# Altium PCB Z693_Test_JK08_V1.0.PcbDoc (part 1 of 2)
Units mil, origin at the board's own origin, x right, y up, seen from the top; angles counter-clockwise.
Board outline 3841.14 x 4075.65 mil, 2 copper layers (Top Layer, Bottom Layer); 150 components, 98 nets, 518 pads, 261 vias.
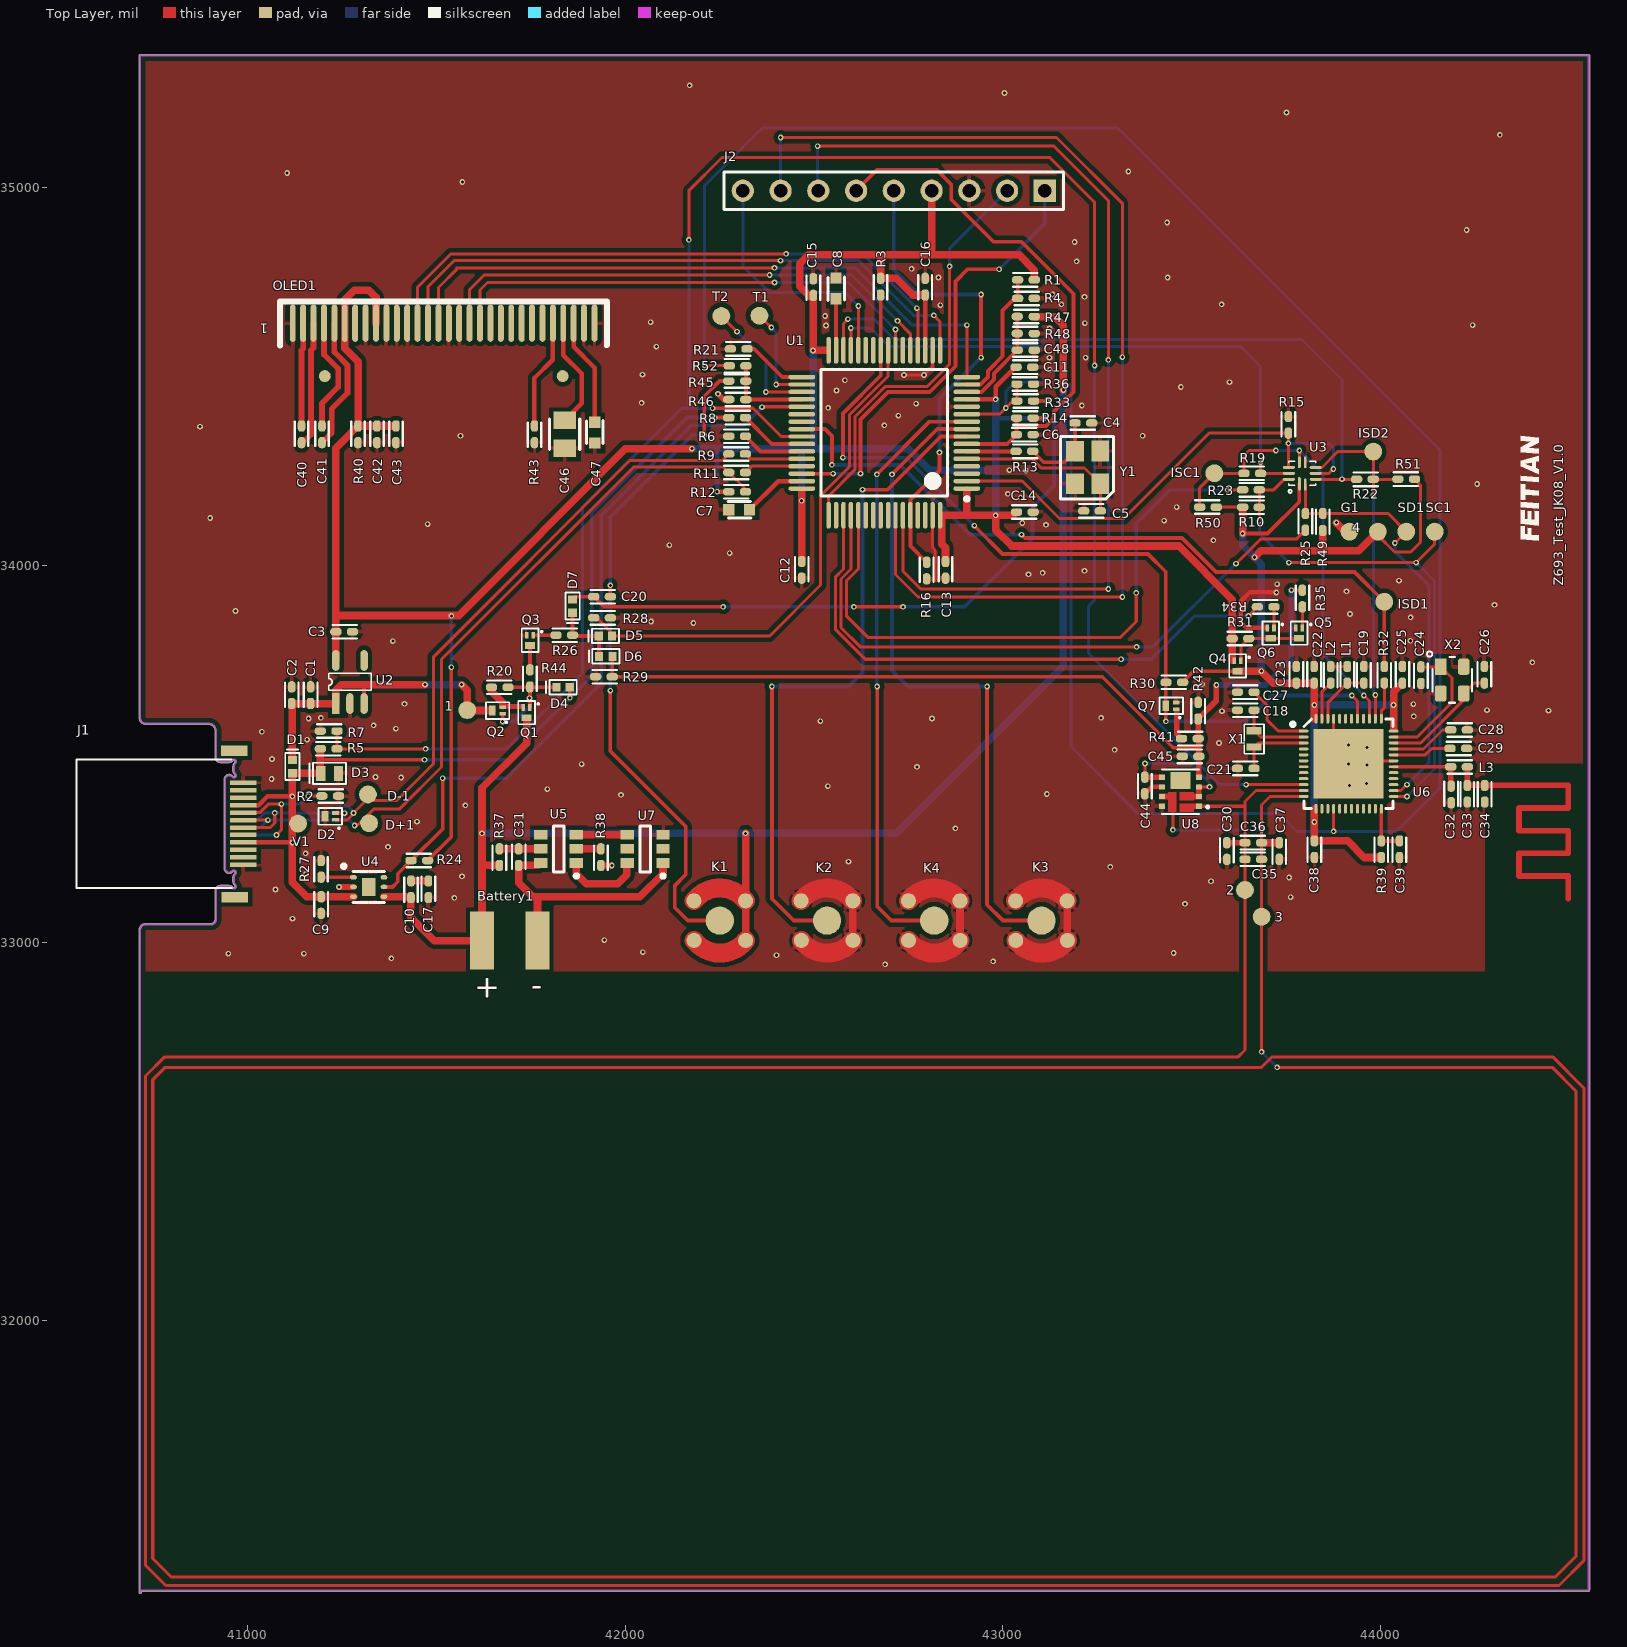
[diagram p0: Top Layer view]
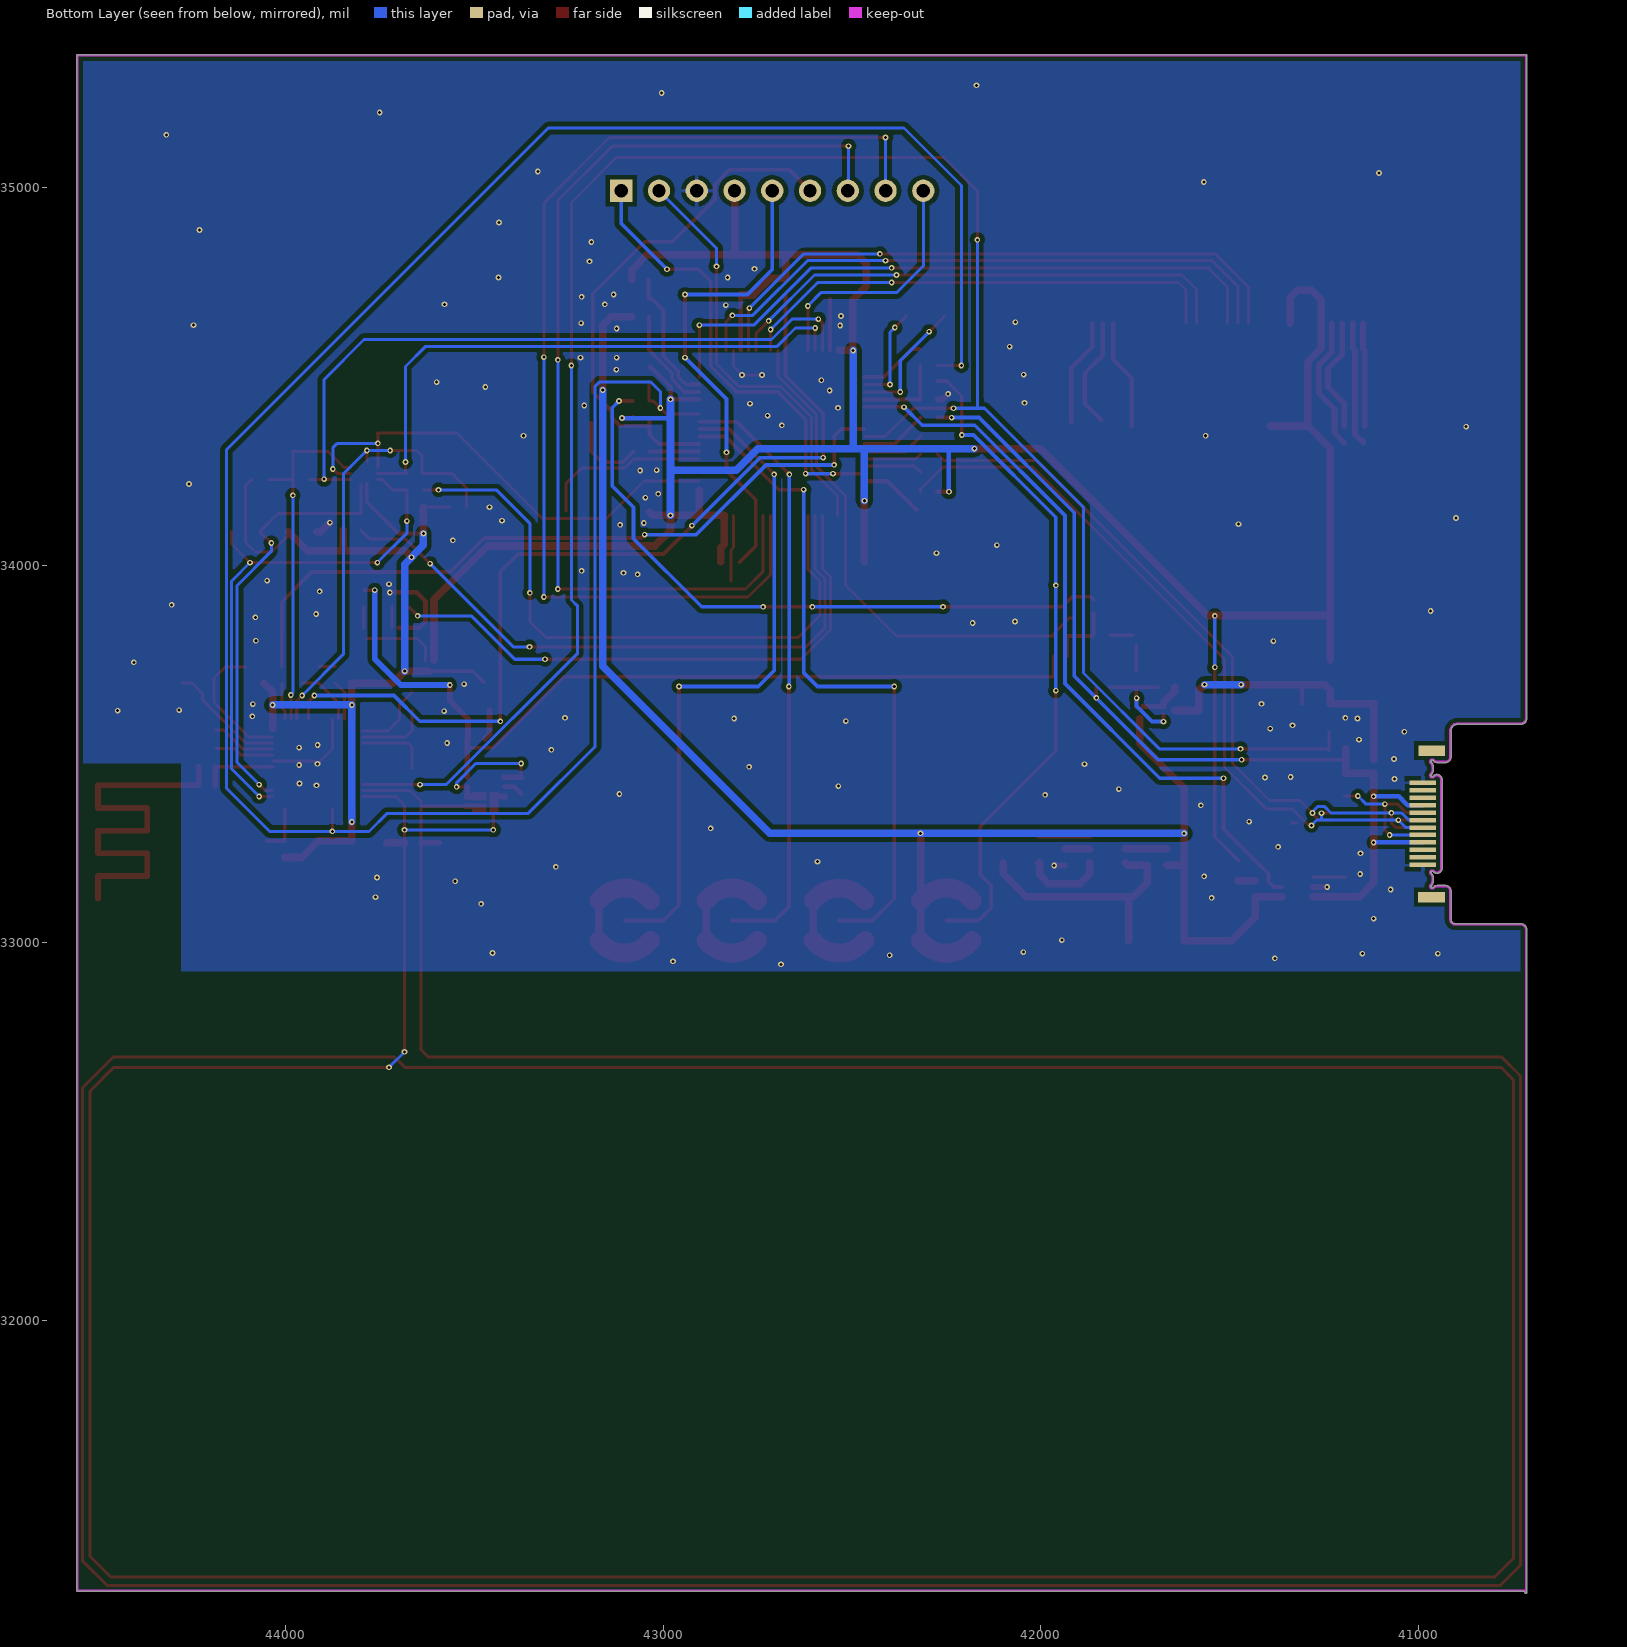
[diagram p1: Bottom Layer view, seen from below]

## Layer stack, top to bottom
Top Layer: signal copper 1.4
Dielectric: dielectric 12.6, FR-4, Dk 4.8
Bottom Layer: signal copper 1.4

## Board outline
40712.37,31279.31 ccw(c40714.89,31279.31) 40717.4,31279.31 40717.4,31282.49 44551,31282.49 ccw(c44551,31285) 44553.51,31285 44553.51,35349.94 ccw(c44551,35349.94) 44551,35352.46 40714.89,35352.46 ccw(c40714.89,35349.94) 40712.37,35349.94 40712.37,33594.94 ccw(c40728.67,33594.94) 40728.64,33578.65 ccw(c40728.67,33594.94) 40728.67,33578.65 cw(c40728.67,33581.16) 40728.64,33578.65 40728.67,33578.65 40895.99,33578.65 cw(c40895.99,33561.48) 40913.16,33561.48 ccw(c40915.68,33561.48) 40913.16,33561.46 40913.16,33491.79 ccw(c40927.49,33491.79) 40927.49,33477.47 40949.7,33477.47 ccw(c40949.7,33491.79) 40960.38,33482.24 cw(c40962.91,33479.98) 40966.3,33479.98 cw(c40962.91,33479.98) 40965.17,33477.46 ccw(c40974.72,33466.78) 40960.39,33466.78 40960.39,33466.77 40960.41,33456.02 ccw(c40962.92,33456.03) 40960.41,33455.91 ccw(c40974.72,33456.57) 40965.17,33445.9 cw(c40962.91,33443.37) 40966.3,33443.37 cw(c40962.91,33443.37) 40960.37,33441.13 ccw(c40949.62,33431.65) 40951.44,33445.86 ccw(c40949.62,33431.65) 40951.41,33445.86 40951.44,33445.86 ccw(c40951.1,33443.37) 40951.1,33445.88 ccw(c40951.1,33431.56) 40936.77,33431.58 ccw(c40951.1,33431.56) 40936.77,33431.56 cw(c40939.29,33431.56) 40936.77,33431.58 cw(c40939.29,33431.56) 40936.77,33431.59 40936.77,33431.56 40936.77,33198.09 ccw(c40939.29,33198.09) 40936.77,33198.06 cw(c40951.1,33198.09) 40936.77,33198.07 cw(c40951.1,33198.09) 40936.77,33198.09 40936.77,33431.56 40936.77,33198.06 ccw(c40951.1,33198.09) 40951.07,33183.77 ccw(c40951.1,33198.09) 40951.1,33183.77 40951.07,33183.77 ccw(c40951.1,33186.28) 40951.41,33183.79 ccw(c40949.62,33198) 40960.37,33188.52 cw(c40962.91,33186.28) 40966.3,33186.28 cw(c40962.91,33186.28) 40965.17,33183.75 ccw(c40974.72,33173.08) 40960.39,33173.08 40960.39,33162.48 ccw(c40974.72,33162.48) 40965.17,33151.8 cw(c40962.91,33149.27) 40966.3,33149.27 cw(c40962.91,33149.27) 40960.38,33147.01 ccw(c40949.7,33137.46) 40949.73,33151.79 ccw(c40949.7,33137.46) 40949.7,33151.79 cw(c40949.7,33149.27) 40949.73,33151.79 40949.7,33151.79 40927.49,33151.79 ccw(c40927.49,33149.27) 40927.46,33151.79 cw(c40927.49,33137.46) 40927.49,33151.79 40927.46,33151.79 ccw(c40927.49,33137.46) 40913.16,33137.46 40913.16,33061.87 cw(c40915.68,33061.87) 40913.16,33061.89 40913.16,33061.87 cw(c40901.9,33061.87) 40901.9,33050.61 40728.67,33050.61 ccw(c40728.67,33034.31) 40712.37,33034.31

## Design rules (kind name [scope] priority, off if disabled: settings)
Clearance Clearance_1 [InPolygon] p1: gap=12
Clearance [All] p2: gap=6
HoleToHoleClearance [All] p1: gap=0 allowstackedmicrovias=TRUE
MinimumSolderMaskSliver [All] p1: minsoldermaskwidth=0
PolygonConnect PolygonConnect_1 [isvia] p1: connectstyle=Direct reliefconductorwidth=10 reliefentries=4 polygonreliefangle="90 Angle"
PolygonConnect [All] p2: connectstyle=Relief reliefconductorwidth=10 reliefentries=4 polygonreliefangle="90 Angle"
RoutingVias [All] p1: holewidth=4 width=25 viastyle="Through Hole" minholewidth=8 minwidth=15 maxholewidth=28 maxwidth=50
SilkToSilkClearance [All] p1: silktosilkclearance=0
SilkscreenOverComponentPads [All] p1: minsilkscreentomaskgap=0
SolderMaskExpansion [All] p1: expansion=4
Width [All] p1: maxlimit=150 minlimit=6 preferedwidth=10
24 further rules are at their usual default settings.

## Components (designator, comment, footprint, x,y, rotation, side; value= is the part's Value field where it differs from the comment)
1 "" FT_TEST_1 41580.89,33616.25 r90 top
2 "" FT_TEST_1 43641,33140 r90 top
3 "" FT_TEST_1 43685,33069 r90 top
4 "" FT_TEST_1 43993,34089 r90 top
Battery1 "Battery" FT_CELL 41666,32927.83 r90 top
C1 "0.1uF" FT_0402#1 41166,33633.83 r90 top
C2 "1uF" FT_0402#1 41116,33633.83 r90 top
C3 "1uF" FT_0402#1 41233,33823.83 r0 top
C4 "15p" FT_0402#1 43234.78,34376.83 r180 top
C5 "15p" FT_0402#1 43257.89,34143.83 r180 top
C6 "100n" FT_0402#1 43079.89,34345.83 r180 top
C7 "2u2" FT_0603 42273.78,34146.76 r0 top
C8 "2u2" FT_0603 42557.78,34760.83 r270 top
C9 "1uF" FT_0402#1 41193.89,33077.83 r90 top
C10 "1uF/16V" FT_0402#1 41432,33163.83 r270 top
C11 "100n" FT_0402#1 43034.89,34524.83 r0 top
C12 "100n" FT_0402#1 42466.89,33965.83 r90 top
C13 "100n" FT_0402#1 42847.78,33965.83 r90 top
C14 "100n" FT_0402#1 43079.89,34140.83 r180 top
C15 "100n" FT_0402#1 42497.78,34758.83 r270 top
C16 "100n" FT_0402#1 42793.89,34759.83 r270 top
C17 "1uF/16V" FT_0402#1 41478,33119.83 r90 top
C18 "12pF" FT_0402#1 43665,33615.83 r180 top
C19 "1uF" FT_0402#1 43956,33731.83 r270 top
C20 "0.1uF" FT_0402#1 41916,33916.83 r0 top
C21 "12pF" FT_0402#1 43665,33461.83 r180 top
C22 "4.7uF" FT_0402#1 43824,33687.83 r90 top
C23 "1uF" FT_0402#1 43776.9,33687.83 r90 top
C24 "12pF" FT_0402#1 44106.89,33730.83 r270 top
C25 "0.1uF" FT_0402#1 44058,33687.83 r90 top
C26 "12pF" FT_0402#1 44275,33687.83 r90 top
C27 "0.1uF" FT_0402#1 43665,33663.83 r180 top
C28 "100pF" FT_0402#1 44185.89,33563.83 r0 top
C29 "NC" FT_0402#1 44184,33514.83 r0 top
C30 "NC" FT_0402#1 43593,33221 r90 top
C31 "1uf" FT_0402#1 41717.22,33204.83 r90 top
C32 "0.8pF" FT_0402#1 44186.89,33370.83 r90 top
C33 "NC" FT_0402#1 44229.89,33416.83 r270 top
C34 "1.2pF" FT_0402#1 44275.89,33416.83 r270 top
C35 "NC" FT_0402#1 43685,33221.11 r180 top
C36 "NC" FT_0402#1 43685,33265.11 r180 top
C37 "NC" FT_0402#1 43732,33265.11 r270 top
C38 "0.1uF" FT_0402#1 43824.89,33269.83 r270 top
C39 "1uF" FT_0402#1 44050.1,33269.83 r270 top
C40 "1uF" FT_0402#1 41142,34324.83 r90 top
C41 "1uF" FT_0402#1 41196.25,34324.83 r90 top
C42 "0.1uF" FT_0402#1 41341.75,34324.83 r90 top
C43 "0.1uF" FT_0402#1 41392,34324.83 r90 top
C44 "1uF/16V" FT_0402#1 43375.88,33438.65 r270 top
C45 "1uF" FT_0402#1 43518.88,33493.65 r180 top
C46 "4.7uF" FT_0805 41839,34383.83 r270 top
C47 "2.2uF" FT_0603 41919,34323.83 r90 top
C48 "0.01u" FT_0402#2 43082.89,34569.83 r180 top
D1 "DFN1006/WSB5546N-2/TR/1.0*0.6mm" WSB5546N 41117.89,33466.83 r90 top
D2 "ESD5302N-3/TR/NC" FT_DFN1006-3L 41231.89,33325.83 r90 top
D3 "ESD56201D10-2/TR/NC" DFN1610 41240,33448.83 r180 top
D4 "DFN1006/WSB5546N-2/TR/1.0*0.6mm" WSB5546N 41835,33676.83 r180 top
D5 "DFN1006/WSB5546N-2/TR/1.0*0.6mm" WSB5546N 41947,33812.83 r180 top
D6 "DFN1006/WSB5546N-2/TR/1.0*0.6mm" WSB5546N 41948,33758.83 r180 top
D7 "DFN1006/WSB5546N-2/TR/1.0*0.6mm" WSB5546N 41860,33891.83 r270 top
D+1 "" FT_TEST_1 41320.89,33316.83 r180 top
D-1 "" FT_TEST_1 41317.89,33392.83 r180 top
G1 "" FT_TEST_1 43917.76,34089 r0 top
ISC1 "" FT_TEST_1 43559.89,34243.83 r90 top
ISD1 "" FT_TEST_1 44009.89,33903.11 r90 top
ISD2 "" FT_TEST_1 43980.89,34301 r90 top
J1 "USB-FM0512-D5509（内芯）（夹板式0.8mm）" FM0512-D5509 40988,33206.83 r270 top
J2 "烧写点" FT_SIP_9 43110.89,34991.83 r180 top
K1 "锅仔片/5mm" FT_BUTTON_5mm 42250,33058.83 r0 top
K2 "OK" FT_BUTTON_5mm 42534,33058.83 r180 top
K3 "UP" FT_BUTTON_5mm 43102,33058.83 r0 top
K4 "DOWN" FT_BUTTON_5mm 42818,33058.83 r0 top
L1 "15nH" FT_0402#1 43912,33687.83 r90 top
L2 "10uH" FT_0402#1 43868,33731.83 r270 top
L3 "3.9nH" FT_0402#1 44186,33465.83 r0 top
OLED1 "UGOLED-12864" OLED_PIN30 41118.78,34641.09 r0 top
Q1 "DFN1006-3L/WPM2049B-3/TR/PMOS管" FT_DFN1006-3L 41746.86,33623.39 r180 top
Q2 "DFN1006-3L/WPM2049B-3/TR/PMOS管" FT_DFN1006-3L 41674.86,33606.39 r90 top
Q3 "DFN1006-3L/WNM2046B-3/TR/NMOS管" FT_DFN1006-3L 41756,33814.83 r180 top
Q4 "DFN1006-3L/WPM2049B-3/TR/PMOS管" FT_DFN1006-3L 43630,33746.83 r180 top
Q5 "DFN1006-3L/WNM2046B-3/TR/NMOS管" FT_DFN1006-3L 43793,33833.83 r180 top
Q6 "DFN1006-3L/WNM2046B-3/TR/NMOS管" FT_DFN1006-3L 43717.89,33833.83 r180 top
Q7 "DFN1006-3L/WNM2046B-3/TR/NMOS管" FT_DFN1006-3L 43458.89,33618.83 r90 top
R1 "NC" FT_0402#1 43082.89,34755.83 r180 top
R2 "5.1K" FT_0402#1 41196,33388.83 r0 top
R3 "10k" FT_0402#1 42675.78,34759.83 r270 top
R4 "NC" FT_0402#1 43038.89,34706.83 r0 top
R5 "10K" FT_0402#1 41236,33513.83 r180 top
R6 "0R" FT_0402#1 42317.78,34341.75 r180 top
R7 "20K" FT_0402#1 41192,33560.83 r0 top
R8 "22R" FT_0402#1 42273.78,34390.97 r0 top
R9 "22R" FT_0402#1 42317.78,34294.72 r180 top
R10 "10K" FT_0402#1 43634.89,34153.83 r0 top
R11 "22R" FT_0402#1 42317.78,34245.7 r180 top
R12 "1.5k" FT_0402#1 42317.78,34194.68 r180 top
R13 "390R" FT_0402#1 43034.89,34301.83 r0 top
R14 "10k" FT_0402#1 43035.89,34389.93 r0 top
R15 "10K" FT_0402#1 43755.89,34349.83 r90 top
R16 "10k" FT_0402#1 42797.78,33963.83 r90 top
R19 "NC" FT_0402#1 43682.33,34243.39 r180 top
R20 "100K" FT_0402#1 41689,33676.83 r180 top
R21 "0R" FT_0402#1 42322,34573 r180 top
R22 "NC" FT_0402#1 43936.7,34227.65 r0 top
R23 "NC" FT_0402#1 43634.89,34199.83 r0 top
R24 "10K" FT_0402#1 41476,33217.83 r180 top
R25 "NC" FT_0402#1 43800.89,34092.83 r90 top
R26 "100K" FT_0402#1 41816,33814.83 r0 top
R27 "20K" FT_0402#1 41193.89,33217.83 r270 top
R28 "10K" FT_0402#1 41916,33860.66 r0 top
R29 "10K" FT_0402#1 41921,33704.83 r0 top
R30 "10k" FT_0402#1 43475.89,33689.83 r180 top
R31 "100K" FT_0402#1 43651,33805.83 r180 top
R32 "0R" FT_0402#1 44010,33731.83 r270 top
R33 "10K" FT_0402#1 43036.89,34434.93 r0 top
R34 "100K" FT_0402#1 43717.89,33889.72 r180 top
R35 "100K" FT_0402#1 43793,33889.83 r90 top
R36 "20K" FT_0402#1 43080.89,34479.83 r180 top
R37 "470R" FT_0402#1 41666.22,33248.83 r270 top
R38 "2K" FT_0402#1 41934.89,33248.83 r270 top
R39 "100k" FT_0402#1 44002,33269.83 r270 top
R40 "1K" FT_0402#1 41291.5,34324.83 r90 top
R41 "100K" FT_0402#1 43472.89,33540.83 r0 top
R42 "150K" FT_0402#1 43516.89,33636.83 r270 top
R43 "390K" FT_0402#1 41759,34368.83 r270 top
R44 "10K" FT_0402#2 41747,33722.83 r270 top
R45 "10K" FT_0402#2 42318.98,34487.83 r180 top
R46 "20K" FT_0402#2 42273.78,34439.01 r0 top
R47 "5.1M" FT_0402#2 43037.69,34658.83 r0 top
R48 "5.1M" FT_0402#2 43082.89,34613.73 r180 top
R49 "10K" FT_0402#2 43847,34092 r90 top
R50 "10K" FT_0402#1 43565,34154 r180 top
R51 "10K" FT_0402#1 44090,34228 r180 top
R52 "NC" FT_0402#1 42319,34528 r180 top
SC1 "" FT_TEST_1 44143.49,34089 r90 top
SD1 "" FT_TEST_1 44068.24,34089 r90 top
T1 "" FT_TEST_1 42355,34661 r0 top
T2 "" FT_TEST_1 42254,34660 r0 top
U1 "STM32F205RET6(512KFLASH/128SRAM)" TQFP64_N 42685.78,34350.83 r180 top
U2 "BL8555-33PRN" FT_SOT23_5 41232.89,33627.83 r90 top
U3 "WQFN-10/BCT4717/1.4*1.8mm" FT_WQFN_10 43784.89,34215.83 r0 top
U4 "WS4518D" FT_DFN2X2-6L 41320,33147.83 r0 top
U5 "S-8261" SOT26A-6L 41822.89,33248.83 r180 top
U6 "nRF52832-QFAA" QFN48N 43915.39,33474.13 r0 top
U7 "2166" SOT26A-6L 42052.22,33248.83 r180 top
U8 "USP-8B10/XCM414B033D2-G" XCM414-USP-8B10 43518.88,33361.65 r90 top
V1 "" FT_TEST_1 41132.89,33315.83 r90 top
X1 "SMD2012/2脚贴装/32.768KHz-12.5pF-20PPM" FT_OSC_32.768M_SMD_2 43665,33561.83 r270 top
X2 "SMD2016/4脚贴装/32MHZ" XTAL_16M 44190,33695.83 r270 top
Y1 "8M" FT_OSC_4-3225 43257.78,34215.83 r90 top
Z693_Test_JK08_V1.0 "Z693_Text_JK08_V1.0" FT_LOGO_300_Y 44448,34055 r90 top

## Footprints (in the part's own frame and the unit in brackets; to place one, negate y for a bottom-side part, rotate by r counter-clockwise, add the part's x,y. Pads: shape width x height; smd on the part's side, far side on the other; paste and mask are expansions set on the pad)
DFN1610 [mm]
  rect 0.625x1 smd: 1(0,0) 2(1.2,0)
  silkscreen extent -0.52,-0.71 1.95,0.71
FM0512-D5509 [mm]
  rect 0.7x1.8 smd: 0(-7.671,-0.61) 0(2.184,-0.584)
  rect 0.7x1.8 smd far side: 0(-7.671,-0.61) 0(2.184,-0.584)
  rect 0.3x1.8 smd: A1(-5.5,0) A2(-5,0) A3(-4.5,0) A4(-4,0) A5(-3.5,0) A6(-3,0) A7(-2.5,0) A8(-2,0) A9(-1.5,0) A10(-1,0) A11(-0.5,0) A12(0,0)
  rect 0.3x1.8 smd far side: B1(0,0) B2(-0.5,0) B3(-1,0) B4(-1.5,0) B5(-2,0) B6(-2.5,0) B7(-3,0) B8(-3.5,0) B9(-4,0) B10(-4.5,0) B11(-5,0) B12(-5.5,0)
  silkscreen extent -7.07,-11.22 1.57,-0.77
FT_0402#1 [mil]
  rrect80% 30x20 smd: 1(0,0) 2(44,0)
  silkscreen extent -8,-18 56,18
FT_0402#2 [mil]
  rrect80% 30x20 smd: 1(0,0) 2(45.2,-0.1)
  silkscreen extent -8,-18 56,18
FT_0603 [mil]
  rect 30x30 smd: 1(0,0) 2(55,0)
  silkscreen extent -2,-21 59,22
FT_0805 [mil]
  rect 46x60 smd: 1(0,0) 2(74,0)
  silkscreen extent -3,-40 77,40
FT_BUTTON_5mm [mil]
  round 75 smd paste-100: 1(0,0)
  round 40 smd paste-100: 2(-68.62,52.44) 2(-68.17,-52.44) 2(68.17,52.44) 2(68.62,-52.44)
  rect 128x60 on Top Solder: 4(0,-35) 4(0,35)
  Top Layer lines w50: -68.62,52.44 cw(c-0.22,-0.17) -52.83,68.22 cw(c-0.22,-0.17) -5.96,85.92 cw(c-0.22,-0.17) 68.17,52.44 ; -68.17,-52.44 ccw(c0.22,0.17) 52.83,-68.22 ccw(c0.22,0.17) 68.62,-52.44
FT_CELL [mil]
  rect 153.54x62.99 smd: 1(78,46) 2(78,-101)
FT_DFN2X2-6L [mm]
  oval 0.45x0.3 smd: 1(-1.025,0.65) 2(-1.025,0) 3(-1.025,-0.65) 4(1.025,-0.65) 5(1.025,0) 6(1.025,0.65)
  rect 0.9x1.2 smd: 7(0,0)
  silkscreen extent -1.8,-1.05 1.05,1.52, body extent -1.05,-1.05 1.05,1.05, height 0.75
FT_DFN1006-3L [mm]
  rect 0.25x0.45 smd: 1(0,0) 2(0.45,0)
  rect 0.7x0.45 smd: 3(0.225,0.7)
  silkscreen extent -0.62,-0.44 0.78,1.13
FT_LOGO_300_Y [mil]
  silkscreen extent 10,30 288,76
FT_OSC_4-3225 [mm]
  rect 1.4x1.2 smd: 1(0,0) 2(2.2,0) 3(2.184,1.702) 4(0,1.7)
  silkscreen extent -1.02,-0.89 3.18,2.67
FT_OSC_32.768M_SMD_2 [mm]
  rect 0.5x1 smd: 1(0,0) 2(1.1,0)
  silkscreen extent -0.43,-0.66 1.55,0.66, body extent -0.41,-0.64 1.52,0.61, height 0.5
FT_SIP_9 [mm]
  rect 1.5x1.5 hole 0.9: 1(0,0)
  round 1.5 hole 0.9: 2(2.54,0) 3(5.08,0) 4(7.62,0) 5(10.16,0) 6(12.7,0) 7(15.24,0) 8(17.78,0) 9(20.32,0)
  silkscreen extent -1.27,-1.27 21.59,1.27
FT_SOT23_5 [mm]
  rect 1.4x0.5 smd: 1(0.148,0)
  oval 1.4x0.5 smd: 2(0.148,-0.95) 3(0.148,-1.9) 4(3.048,-1.9) 5(3.048,0)
  silkscreen extent 1.03,-2.38 2.19,0.48
FT_TEST_1 [mm]
  round 1.2 smd: 1(0,0)
FT_WQFN_10 [mm] "BCT4222"
  oval 0.2x0.9 smd: 1(0,0)
  oval 0.2x0.8 smd: 2(0.4,-0.05) 6(0.4,1.45) 7(0,1.45)
  oval 0.8x0.2 smd: 3(1.1,0.3) 4(1.1,0.7) 5(1.1,1.1) 8(-0.7,1.1) 9(-0.7,0.7) 10(-0.7,0.3)
  silkscreen extent -0.72,-0.61 1.11,1.5
OLED_PIN30 [mm]
  round 0.8 smd: 0(2.158,-3.559) 0(18.158,-3.559)
  oval 0.4x2.5 smd: 1(0,0) 2(0.7,0) 3(1.4,0) 4(2.1,0) 5(2.8,0) 6(3.5,0) 7(4.2,0) 8(4.9,0) 9(5.6,0) 10(6.3,0) 11(7,0) 12(7.7,0) 13(8.4,0) 14(9.1,0) 15(9.8,0) 16(10.5,0) 17(11.2,0) 18(11.9,0) 19(12.6,0) 20(13.3,0) 21(14,0) 22(14.7,0) 23(15.4,0) 24(16.1,0) 25(16.8,0) 26(17.5,0) 27(18.2,0) 28(18.9,0) 29(19.6,0) 30(20.3,0)
  silkscreen extent -0.85,-1.55 21.15,1.47
QFN48N [mm] "QFN, 48-Leads, Body 6,0x6,0mm (max), Pitch 0,40mm, IPC Medium Density"
  oval 0.65x0.2 smd: 1(-3.025,2.2) 2(-3.025,1.8) 3(-3.025,1.4) 4(-3.025,1) 5(-3.025,0.6) 6(-3.025,0.2) 7(-3.025,-0.2) 8(-3.025,-0.6) 9(-3.025,-1) 10(-3.025,-1.4) 11(-3.025,-1.8) 12(-3.025,-2.2) 25(3.025,-2.2) 26(3.025,-1.8) 27(3.025,-1.4) 28(3.025,-1) 29(3.025,-0.6) 30(3.025,-0.2) 31(3.025,0.2) 32(3.025,0.6) 33(3.025,1) 34(3.025,1.4) 35(3.025,1.8) 36(3.025,2.2)
  oval 0.2x0.65 smd: 13(-2.2,-3.025) 14(-1.8,-3.025) 15(-1.4,-3.025) 16(-1,-3.025) 17(-0.6,-3.025) 18(-0.2,-3.025) 19(0.2,-3.025) 20(0.6,-3.025) 21(1,-3.025) 22(1.4,-3.025) 23(1.8,-3.025) 24(2.2,-3.025) 37(2.2,3.025) 38(1.8,3.025) 39(1.4,3.025) 40(1,3.025) 41(0.6,3.025) 42(0.2,3.025) 43(-0.2,3.025) 44(-0.6,3.025) 45(-1,3.025) 46(-1.4,3.025) 47(-1.8,3.025) 48(-2.2,3.025)
  rect 4.7x4.7 smd: 49(0,0)
  silkscreen extent -3.87,-3 3,3, body extent -3,-3 3,3, height 0.9
SOT26A-6L [mm] "SOT23, 6-Leads, Body 2.9x1.6mm, Pitch 0.95mm, Lead Span 2.7mm, IPC High Density"
  rect 0.9x0.65 smd: 1(-1.2,0.95) 2(-1.2,0) 3(-1.2,-0.95) 4(1.2,-0.95) 5(1.2,0) 6(1.2,0.95)
  silkscreen extent -1.33,-1.55 0.35,1.95, body extent -0.9,-1.55 0.9,1.55, height 1.45
TQFP64_N [mm] "64-Pin Thin Quad Flat Pack 0.5 mm Pitch, IPC Medium Density"
  oval 1.8x0.3 smd: 1(-5.55,3.75) 2(-5.55,3.25) 3(-5.55,2.75) 4(-5.55,2.25) 5(-5.55,1.75) 6(-5.55,1.25) 7(-5.55,0.75) 8(-5.55,0.25) 9(-5.55,-0.25) 10(-5.55,-0.75) 11(-5.55,-1.25) 12(-5.55,-1.75) 13(-5.55,-2.25) 14(-5.55,-2.75) 15(-5.55,-3.25) 16(-5.55,-3.75) 33(5.55,-3.75) 34(5.55,-3.25) 35(5.55,-2.75) 36(5.55,-2.25) 37(5.55,-1.75) 38(5.55,-1.25) 39(5.55,-0.75) 40(5.55,-0.25) 41(5.55,0.25) 42(5.55,0.75) 43(5.55,1.25) 44(5.55,1.75) 45(5.55,2.25) 46(5.55,2.75) 47(5.55,3.25) 48(5.55,3.75)
  oval 0.3x1.8 smd: 17(-3.75,-5.55) 18(-3.25,-5.55) 19(-2.75,-5.55) 20(-2.25,-5.55) 21(-1.75,-5.55) 22(-1.25,-5.55) 23(-0.75,-5.55) 24(-0.25,-5.55) 25(0.25,-5.55) 26(0.75,-5.55) 27(1.25,-5.55) 28(1.75,-5.55) 29(2.25,-5.55) 30(2.75,-5.55) 31(3.25,-5.55) 32(3.75,-5.55) 49(3.75,5.55) 50(3.25,5.55) 51(2.75,5.55) 52(2.25,5.55) 53(1.75,5.55) 54(1.25,5.55) 55(0.75,5.55) 56(0.25,5.55) 57(-0.25,5.55) 58(-0.75,5.55) 59(-1.25,5.55) 60(-1.75,5.55) 61(-2.25,5.55) 62(-2.75,5.55) 63(-3.25,5.55) 64(-3.75,5.55)
  silkscreen extent -5.68,-4.25 4.25,4.57, body extent -5,-5 5,5, height 1.6
WSB5546N [mm]
  rect 0.55x0.6 smd: 1(-0.45,0) 2(0.45,0)
  silkscreen extent -0.91,-0.48 1.14,0.48
XCM414-USP-8B10 [mm]
  rect 1.13x1.34 smd mask+0.05: 0(1.74,1.24)
  rect 0.35x0.4 smd mask+0.05: 1(0,0) 2(0.65,0) 3(1.3,0) 4(1.95,0) 5(1.95,2.48) 6(1.3,2.48) 7(0.65,2.48) 8(0,2.48)
  Top Layer region: 0.405,0.33 0.405,1.29 0.955,1.29 0.955,0.33 0.825,0.33 0.825,-0.187 0.475,-0.187 0.475,0.33
  Top Layer region: -0.375,0.33 -0.375,1.29 0.175,1.29 0.175,-0.187 -0.173,-0.187 -0.173,0.33
  Top Layer region: -0.365,1.52 -0.365,2.07 0.475,2.07 0.475,2.68 0.825,2.68 0.825,2.07 0.955,2.07 0.955,1.52
  silkscreen extent -0.53,-0.62 2.48,2.48
XTAL_16M [mm] "TSX-2520"
  rect 1.1x0.8 smd: 1(-0.901,-0.776)
  rrect50% 1.1x0.8 smd: 2(0.901,-0.776) 3(0.901,0.776) 4(-0.901,0.776)
  silkscreen extent -1.93,-1.71 1.53,1.33, body extent -1.25,-1 1.27,1, height 0.56

## Part data
1 2 3 D+1 D-1 ISC1 ISD1 ISD2 T1 T2 V1: library part JC-1, "JC-2"
4 G1 SC1 SD1: library part TEST
C1 C20 C39: "CAP CER .1UF 16V 10% X7R 0603"
C2 C3 C7 C8 C9 C10 C17 C22 C31 C42 C43 C47 C48: library part CAP, "Capacitor"
C4 C5 C6 C11 C12 C13 C14 C15 C16: library part cap, "Capacitor"
C18 C21 C24 C26: "Capacitor, NP0, ?%"
C19: library part C0603-1?, "Capacitor, X7R, ?0%"
C23 C27: "Capacitor, X5R, ?0%"
C25 C28 C29 C38: "Capacitor, X7R, ?0%"
C30 C35 C36 C37: library part Cap, "Capacitor"
C32: library part C0402-0.8p, "Capacitor, NP0, ?%"
C33: library part C0402-N.C., "Not mounted"
C34: library part C0402-1.2p, "Capacitor, NP0, ?.1pF"
C40 C41 C46: library part C_Dup1
C44 C45: library part CAP_1, "Capacitor"
D1 D4 D5 D6 D7: library part DIODE_1N4148
D2 U8: library part Component_1
D3: library part DIODE_WY
J1: library part A7101
J2: library part "Header 9", "Header, 9-Pin"
K1: "SWITCH USE IN H6"
K2 K3 K4: library part BUTTON
L1: library part L0402-15n, "Inductor, 320mA, ?%"
L2: library part L0603-10?, "Inductor, 80mA, ?0%"
L3: library part L0402-3n9, "Inductor, 170mA, ?.1nH"
OLED1: library part CON5, "Connector"
Q1 Q2 Q4: library part SI2301
Q3 Q5 Q6 Q7: library part NMOS-2, "N-Channel Power MOSFET"
R1 R3 R4 R6 R8 R9 R10 R11 R12 R13 R14 R15 R16 R19 R21 R22 R23 R25 R26 R30 R31 R32 R34 R35 R37 R38 R40 R41 R42 R43 R49 R50 R51 R52: library part RES2
R2: library part RC0603JR-071ML, "RES 1.0M OHM 1/10W 5% 0402 SMD"
R5 R7 R24 R27: library part Resistor, "RES 1.0M OHM 1/10W 5% 0603 SMD"
R20 R44 R47 R48: "RES 10K OHM 1/10W 5% 0603 SMD"
R28 R29 R33 R36 R39 R45 R46: "RES 1.0M OHM 1/10W 5% 0603 SMD"
U1: library part STM32F205RxTx
U2: library part 5TO3
U3: library part SGM3717
U6: "Multi-protocol Bluetooth Low Energy and 2.4GHz proprietary system-on-chip"
U7: library part 8205S-3
X1 X2: "XTAL SMD 2520, 16MHz, 8pF, ?5ppm"
Y1: library part OSC_6
Z693_Test_JK08_V1.0: library part LOGO

## Via types
v1: diameter 15, hole 8, Top Layer to Bottom Layer, tented both sides, 261 vias

## Nets (pads, with @x,y where several pads share a name; then routed paths per layer and width w, separated by ;. In a path a pad name is that pad's centre, name@x,y a point inside that pad or via, vN(x,y) a via of type N, cw(c..) or ccw(c..) an arc to the next point about the centre after c; other vN are vias at no path point)
3V3: C3.1 C11.1 C12.2 C13.2 C14.2 C15.2 C16.2 C42.2 C43.2 J2.4 OLED1.6 OLED1.9 Q4.2 R1.1 R3.1 R12.2 R14.2 R24.1 R31.2 R40.2 U1.1 U1.13 U1.19 U1.32 U1.48 U1.64 U2.5 | length 8037.3
  Top Layer w10: R24.1@41476,33217.83 41538.89,33280.72 v1(41538.89,33729.83)
  Top Layer w12: v1(42243.05,34194.68) R12.2@42273.78,34194.68 ; C16.2@42793.89,34715.83 42793.89,34569.5 U1.19@42794.05,34569.34 ; U1.13@42904.28,34439.42 v1(42980.47,34439.42) 42980.47,34472.42 43033.89,34525.83 C11.1@43034.89,34524.83 ; R14.2@43079.89,34391.83 R14.2@43079.89,34389.93 v1(43108.99,34389.93)
  Top Layer w20: U2.5@41232.89,33747.83 41232.89,33823.72 C3.1@41233,33823.83 41233,33866.83 ; OLED1.9@41339.25,34641.09 41339.25,34709.47 41319.89,34728.83 41281.89,34728.83 41256.57,34703.52 OLED1.6@41256.57,34641.09 41256.57,34574.38 41292.39,34538.57 41292.39,34369.72 R40.2@41291.5,34368.83 ; C43.2@41392,34368.83 C42.2@41341.75,34368.83 R40.2@41291.5,34368.83 ; v1(42175.89,34308.83) 41999.89,34308.83 41557.89,33866.83 41233,33866.83 ; C12.2@42466.89,34009.83 42467.28,34010.22 U1.48@42467.28,34198.88 ; C15.2@42491.83,34708.89 42461.89,34738.83 42461.89,34798.83 42484.89,34821.83 42675.78,34821.83 ; v1@42496.89,34569.34 U1.32@42533.92,34569.34 ; v1@42497.78,34570.23 C15.2@42497.78,34702.94 ; C16.2@42792.89,34716.83 C16.2@42793.89,34715.83 42760.89,34715.83 42716.89,34759.83 R3.1@42675.78,34759.83 42675.78,34821.83 ; J2.4@42810.89,34991.83 42810.89,34821.83 ; C13.2@42847.78,34009.83 42847.78,34045.94 42837.89,34055.83 42837.89,34132.33 42904.28,34132.33 ; U1.1@42904.28,34198.98 42904.28,34132.33 ; C14.2@43035.89,34140.83 43027.39,34132.33 v1(42980.47,34132.33) ; R1.1@43082.89,34755.83 43082.89,34781.83 43042.89,34821.83 42810.89,34821.83 ; 43607,33748 R31.2@43607,33805.83 43607,33909.14 43465.14,34051 43022.72,34051 42980.47,34093.25 v1(42980.47,34132.33) ; 41233,33866.83 41233,34310.33 R40.2@41291.5,34368.83 ; 42675.78,34821.83 42810.89,34821.83 ; 42904.28,34132.33 v1(42980.47,34132.33)
  Bottom Layer w10: v1(41538.89,33729.83) v1(41538.89,33865.83)
  Bottom Layer w12: v1(42243.05,34194.68) 42243.05,34308.68 ; 42980.47,34389.93 v1(43108.99,34389.93)
  Bottom Layer w20: v1(42175.89,34308.83) 42466.89,34308.83 ; v1(42466.89,34170.83) 42466.89,34308.83 ; v1(42496.89,34568.83) 42496.89,34308.83 ; v1(42980.47,34132.33) 42980.47,34252 ; v1(42980.47,34439.42) 42980.47,34389.93 42980.47,34252 ; 42466.89,34308.83 42496.89,34308.83 ; 42496.89,34308.83 42749.59,34308.83 42806.42,34252 42980.47,34252
AN0: C48.2 R47.1 R48.2 U1.14 | length 277.7
  Top Layer w10: U1.14@42904.28,34459.1 42943.12,34459.1 42976,34491.99 42976,34508.25 C48.2@43037.69,34569.93 R48.2@43037.69,34613.83 R47.1@43037.69,34658.83
ANT: C33.1 C34.1 L3.2 | length 1136
  Top Layer w15: L3.2@44230,33465.83 44230,33416.94 C33.1@44229.89,33416.83 44496.89,33416.83 44496.89,33356.84 44366.89,33356.84 44366.89,33296.84 44496.89,33296.84 44496.89,33236.85 44366.89,33236.85 44366.89,33176.85 44496.89,33176.85 44496.89,33116.86
BOOT0: J2.5 R16.2 U1.60 | length 1271.8
  Top Layer w10: R16.2@42797.78,34007.83 42754.68,34050.94 U1.60@42754.68,34132.33 42754.68,34173.68 42832,34251 v1(42832,34299) ; v1(42942,34550) v1(42942,34717)
  Bottom Layer w10: J2.5@42710.89,34991.83 42710.89,34783.11 42777,34717 v1(42942,34717) ; v1(42832,34299) 42832,34440 v1(42942,34550)
BOOT1: J2.9 U1.28 | length 666.4
  Top Layer w8: U1.28@42616.88,34569.34 v1(42616.88,34686.84)
  Bottom Layer w8: J2.9@42310.89,34991.83 42310.89,34792.83 42380.89,34722.83 42580.89,34722.83 v1(42616.88,34686.84)
CC: J1.A5 J1.B5 R2.1 | length 400.7
  Top Layer w8: J1.A5@40988,33344.63 41031.63,33344.63 41054,33367 v1(41088.61,33367) 41088.61,33298.56 v1(41075.63,33285.57) ; v1(41159.83,33388.83) R2.1@41196,33388.83
  Bottom Layer w8: J1.B5@40988,33285.57 v1(41075.63,33285.57) ; v1(41088.61,33367) 41138,33367 v1(41159.83,33388.83)
CHR_CHK: R24.2 U1.37 U4.5 | length 1985.2
  Top Layer w10: U4.5@41360.35,33147.83 41382.89,33147.83 41396.89,33161.83 41396.89,33182.72 R24.2@41432,33217.83 41515.89,33301.72 v1(41515.89,33435.83) ; v1(42361.89,34418.83) 42362.79,34419.73 U1.37@42467.28,34419.73
  Bottom Layer w10: v1(41515.89,33435.83) 41684.89,33435.83 41935.89,33686.83 41935.89,34131.83 42174.89,34370.83 42313.89,34370.83 v1(42361.89,34418.83)
COM_BUS: ISD1.1 R32.1 U1.40 | length 1948.5
  Top Layer w10: U1.40@42467.28,34360.68 42528.89,34360.68 42546.89,34342.68 v1(42546.89,34265.83) ; v1(43048.89,34080.83) 43057.72,34072 43473.83,34072 43564,33981.83 43931.17,33981.83 ISD1.1@44009.89,33903.11 44009.89,33817.83 44010,33817.72 R32.1@44010,33731.83
  Bottom Layer w10: v1(42546.89,34265.83) 42727.89,34265.83 42912.89,34080.83 v1(43048.89,34080.83)
DEC1: C27.1 U6.1 | length 196.9
  Top Layer w8: C27.1@43665,33663.83 43698.89,33629.94 43698.89,33590.83 43728.98,33560.75 U6.1@43796.29,33560.75
GND: C1.2 C2.2 C3.2 C4.1 C5.2 C6.1 C7.1 C8.1 C9.1 C11.2 C12.1 C13.1 C14.1 C15.1 C16.1 C17.1 C18.2 C19.1 C21.2 C22.2 C23.2 C24.2 C25.2 C26.2 C27.2 C28.2 C29.2 C30.1 C32.1 C33.2 C34.2 C37.2 C38.2 C39.2 C42.1 C43.1 C44.2 C45.2 C46.2 C47.1 C48.1 D2.3 D3.1 G1.1 J1.A1 J1.A12 J1.B1 J1.B12 J2.3 K2.2 K3.2 K4.2 OLED1.1 OLED1.8 OLED1.10 OLED1.11 OLED1.12 OLED1.16 OLED1.17 OLED1.29 OLED1.30 Q3.2 Q5.2 Q6.2 Q7.2 R2.2 R4.2 R6.2 R7.1 R15.2 R16.1 R21.2 R27.1 R28.2 R29.1 R36.1 R38.2 R40.1 R42.1 R43.2 R46.1 R48.1 U1.12 U1.18 U1.63 U2.2 U3.6 U4.2 U6.31 U6.45 U6.49 U7.3 U8.6 U8.8 X2.2 X2.4 Y1.2 Y1.4 | length 1304
  Top Layer w8: v1(42738,34504) v1(42791,34504) 42813.73,34526.73 U1.18@42813.73,34569.34 ; U1.63@42813.73,34132.33 42813.73,34046.84 42820.17,34040.4 42820.17,33958.83 ; U6.45@43876.02,33593.23 43876.02,33513.5 v1(43915.39,33474.13) 43923.26,33482.01 U6.31@44034.48,33482.01
  Top Layer w12: C44.2@43375.88,33394.65 43394.06,33412.83 U8.6@43421.24,33412.83 ; Q6.2@43700.17,33833.83 43645.17,33833.83 43629.43,33849.57 43629.43,33904.43 43653,33928 v1(43724,33928)
  Top Layer w15: v1(41241.17,33147.83) U4.2@41279.65,33147.83 ; R38.2@41934.89,33204.83 v1(41964.17,33204.83) ; v1(42245,34454) 42259.99,34439.01 R46.1@42273.78,34439.01
  Top Layer w20: K2.2@42602.17,33111.27 42602.17,33006.84 K2.2@42602.62,33006.4 ; K4.2@42886.17,33111.27 42886.17,33006.84 K4.2@42886.62,33006.4 ; K3.2@43170.17,33111.27 43170.17,33022.55 K3.2@43174.89,33017.83 ; v1(43883,34113) 43907,34089 G1.1@43917.76,34089
  other v1: 42688,32943 42974,32951 41380,32959 42400,32967 40948.11,32971 41148.11,32971 43452.11,32973 42046,32975 41944,33007 41118,33064 43482,33103 41547,33119 43762,33121 41073,33141 43551,33163 43758,33173 41567,33176 41154,33182 43284.11,33201 42591,33215 41153,33237 41371,33254 42874,33303 41448,33321 41576,33364 41988.11,33392 43116.11,33394 41793,33407 42536,33415 43918,33417 43963,33422 41063,33434 41406,33438 41338,33439 42772.11,33466 43964,33471 41884.11,33473 41064,33487 43296,33511 43964,33517 43915,33524 43572.11,33529 41157,33538 41037,33559 41392,33567 41333,33576 42516.11,33587 41161,33594 42812.11,33594 41193,33596 43260.11,33596 44088,33600 43580,33613.67 44445,33615 44282,33616 44087,33632 41415,33633 43527,33685 44402,33743 41384,33799 44079,33800 42180,33847 42068,33851 44080,33862 43919,33871 40967,33879 44302,33895 43910,33931 43726,33950 44049,33959 43067.51,33976 43105,33980 43216,33985 42276.11,34032 42116.11,34053 43557,34066 43114,34107 41476.11,34109 43051,34112 43427,34118 40900.11,34125 43460,34154 43047,34179 43013,34189 44256,34215 43061,34251 43017,34252 41563,34343 43370,34343 40873,34367 42685.78,34370.52 42723,34396 42537,34417 43209,34423 42770,34428 42043,34430 42559,34463 43471,34472 43600,34485 42581,34490 42045,34505 43124,34518 43123,34550 43219,34550 42082,34579 43123,34627 42531,34635 44244.11,34636 43217,34641 42067,34644 42529,34660 42834,34689 43154.65,34691 43579,34691 43216,34711 43131,34717 42829,34762 43436.11,34762 42758,34785 43195,34805 43190,34856 44228.11,34888 43435,34908 41568,35015 41104,35039 43332,35043 44316.11,35140 43751,35199 43004.11,35251 42170,35271
I2C_SCL: R19.1 U1.29 U3.9 | length 1548.8
  Top Layer w8: U1.29@42597.2,34569.34 v1(42597.2,34628.53) ; R19.1@43678.89,34244.83 43680.33,34243.39 R19.1@43682.33,34243.39 ; v1(43682.33,34273.39) R19.1@43682.33,34243.39 ; U3.9@43757.33,34243.39 R19.1@43682.33,34243.39
  Bottom Layer w8: v1(42597.2,34628.53) 42649.2,34628.53 42697.89,34579.83 43629.17,34579.83 43682.33,34526.67 v1(43682.33,34273.39)
I2C_SCL_B: ISC1.1 R19.2 R50.2 U3.7 U6.39 | length 1202.2
  Top Layer w8: R50.2@43521,34154 43521,34204.94 ISC1.1@43559.89,34243.83 43560.33,34243.39 R19.2@43638.33,34243.39 43638.33,34290.33 43651.89,34303.89 v1(43722.89,34303.89) ; U3.7@43784.89,34272.92 v1(43784.89,34303.89) ; v1(43956,33655) 43970.5,33640.5 U6.39@43970.5,33593.23
  Bottom Layer w8: v1(43722.89,34303.89) v1(43784.89,34303.89) 43847,34241.78 43847,33764 v1(43956,33655)
I2C_SDA: R22.1 U1.30 U3.3 | length 1835.2
  Top Layer w8: U1.30@42577.51,34569.34 42577.51,34640.46 v1(42588.89,34651.83) ; U3.3@43828.2,34227.65 R22.1@43936.7,34227.65
  Bottom Layer w8: v1(42588.89,34651.83) 42658.89,34651.83 42712.89,34597.83 43792.17,34597.83 43898,34492 v1(43898,34227.83)
I2C_SDA_B: ISD2.1 R22.2 R51.2 U3.5 U6.38 | length 945
  Top Layer w8: U3.5@43828.2,34259.14 43845.2,34259.14 43887.06,34301 ISD2.1@43980.89,34301 R22.2@43980.89,34227.65 ; R22.2@43980.7,34227.65 R22.2@43980.89,34227.65 ; v1(43980.89,34185) R22.2@43980.89,34227.65 ; U6.38@43986.25,33593.23 v1(43986.25,33656.25) ; R51.2@44045.65,34227.65 R22.2@43980.89,34227.65
  Bottom Layer w8: v1(43980.89,34185) 43980.89,33661.62 v1(43986.25,33656.25)
KEY-DN: K4.1 U1.10 | length 1624.5
  Top Layer w10: v1(42665.89,34240.83) 42805.42,34380.36 42825.89,34380.36 ; v1(42666.89,33678.83) 42666.89,33095.83 42703.89,33058.83 K4.1@42818,33058.83 ; 42809.42,34380.36 42825.89,34380.36 ; U1.10@42904.28,34380.36 42825.89,34380.36
  Bottom Layer w10: v1(42665.89,34240.83) 42665.89,33679.83 v1(42666.89,33678.83)
KEY-OK: K2.1 U1.8 | length 1806.4
  Top Layer w10: v1(42387.89,33678.83) 42387.89,33116.83 42445.89,33058.83 K2.1@42534,33058.83 ; v1(42627.89,34200) 42694.06,34200 42835.05,34340.99 U1.8@42904.28,34340.99
  Bottom Layer w10: v1(42387.89,33678.83) 42590.83,33678.83 42627.89,33715.89 v1(42627.89,34200)